# Altium PCB v0.0.PcbDoc
Units mil, origin at the board's own origin, x right, y up, seen from the top; angles counter-clockwise.
Board outline 2000 x 1000 mil, 2 copper layers (Top Layer, Bottom Layer); 73 components, 38 nets, 200 pads, 10 vias.
Unrouted connection lines stored in the file: 154.
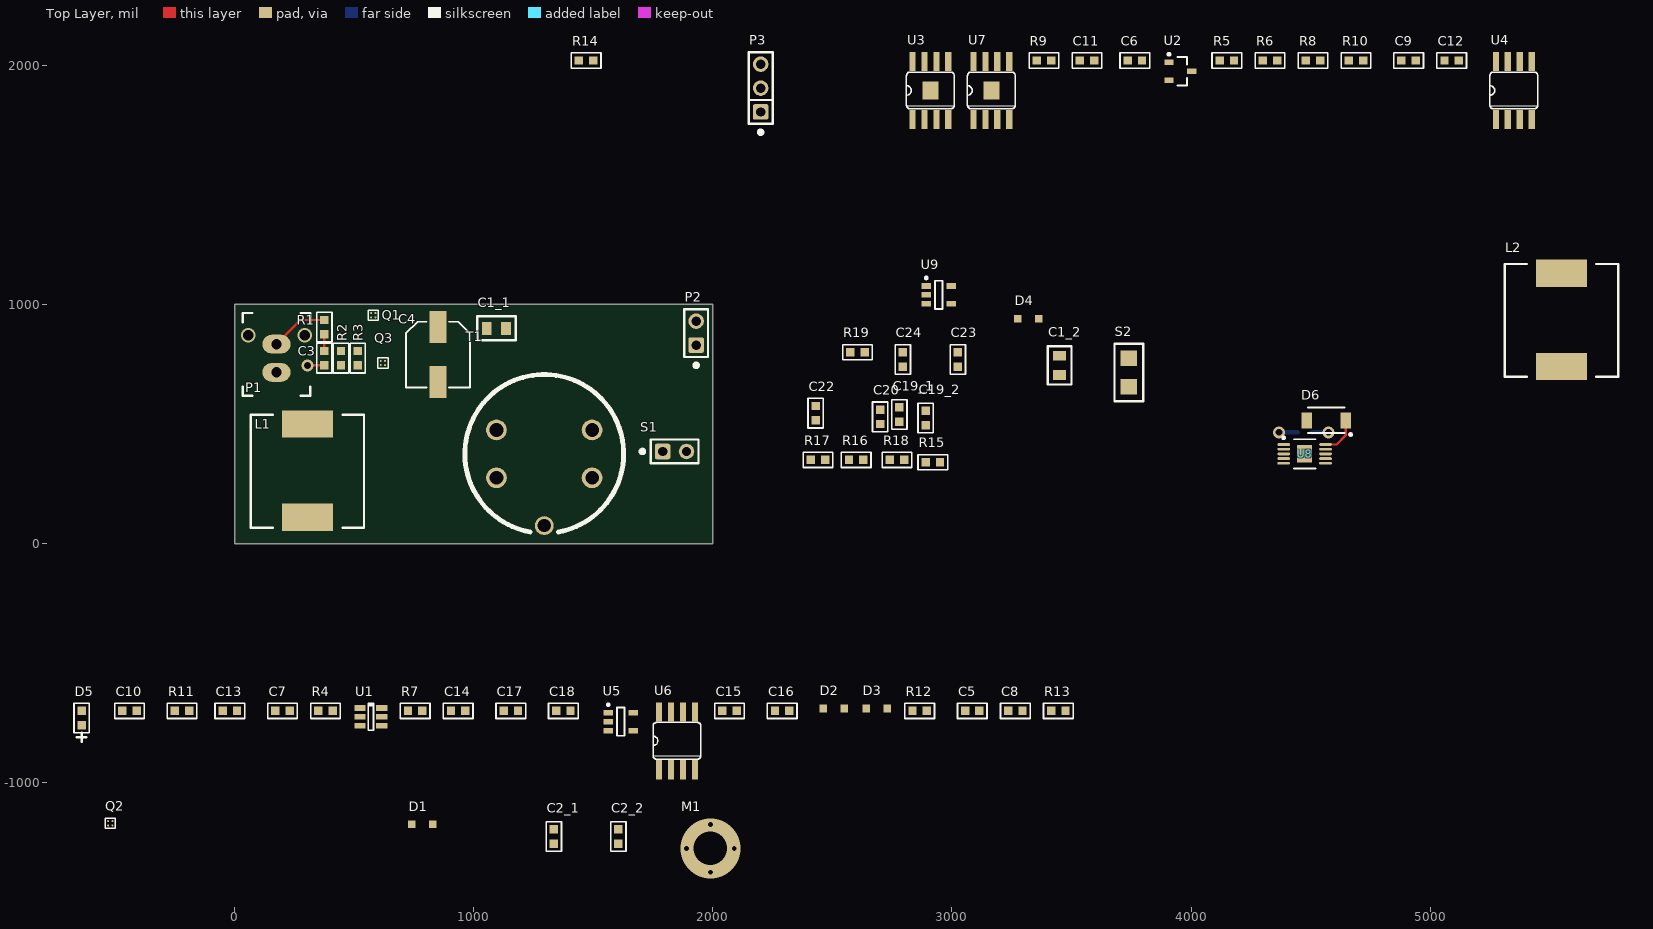
[diagram p0: Top Layer view]
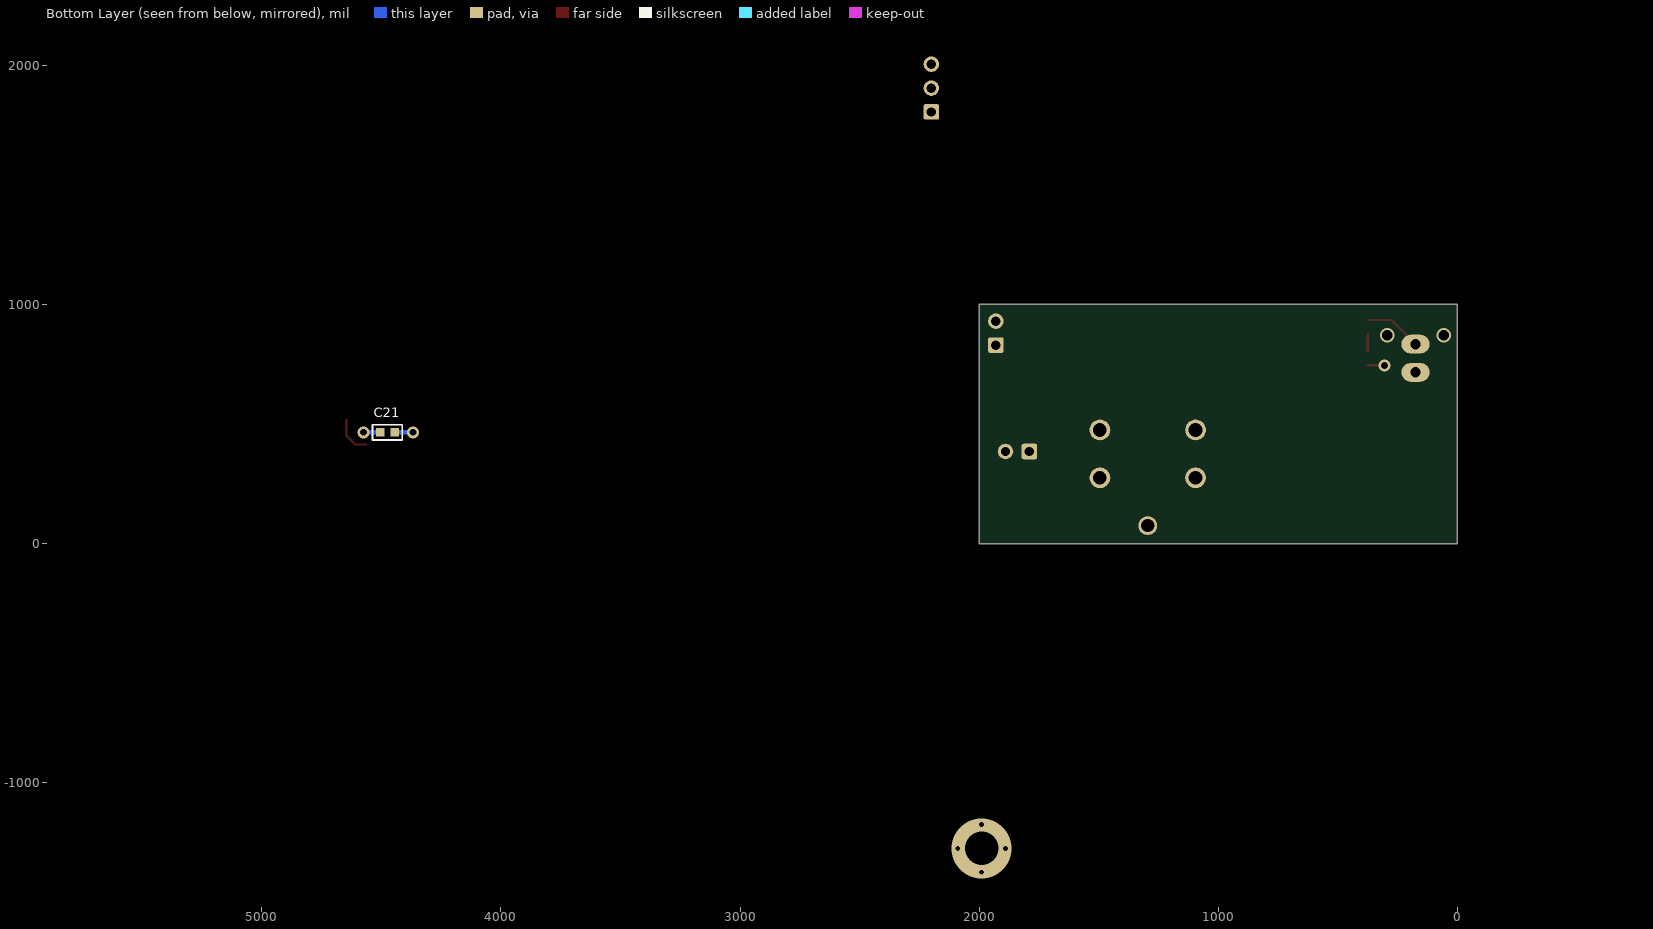
[diagram p1: Bottom Layer view, seen from below]

## Layer stack, top to bottom
Top Solder: solder mask 0.4, Solder Resist, Dk 3.5
Top Layer: signal copper 1.4
Dielectric 1: dielectric 12.6, FR-4, Dk 4.8
Bottom Layer: signal copper 1.4
Bottom Solder: solder mask 0.4, Solder Resist, Dk 3.5

## Board outline
0,0 0,1000 2000,1000 2000,0

## Design rules (kind name [scope] priority, off if disabled: settings)
Clearance [All] p1: gap=10 ignorepadtopadclearanceinfootprint=FALSE except(0: Arc-Hole Track-Hole SMDPad-Hole THPad-Hole Via-Hole Fill-Hole Poly-Hole Region-Hole Text-Hole)
PolygonConnect [All] p1: connectstyle=Relief reliefconductorwidth=10 reliefentries=4 polygonreliefangle="90 Angle" airgapwidth=10
RoutingVias [All] p1: holewidth=28 width=50 viastyle="Through Hole" minholewidth=28 minwidth=50 maxholewidth=28 maxwidth=50
SilkToSilkClearance [All] p1 off: silktosilkclearance=10
SolderMaskExpansion [All] p1: expansion=4
Width [All] p1: maxlimit=50 minlimit=10 preferedwidth=10 bottomlayer_maxwidth=10 minimp=50.000000 maximp=50.000000 favimp=50.000000
29 further rules are at their usual default settings.

## Components (designator, comment, footprint, x,y, rotation, side; value= is the part's Value field where it differs from the comment)
C1_1 "TriCap" TRICAP_0805 1095,900 r0 top value=1u
C1_2 "TriCap" tricap_0805 3450,745 r90 top value=1u
C2_1 "TriCap" TRICAP_0603 1335,-1225 r90 top value=10u
C2_2 "TriCap" TRICAP_0603 1605,-1225 r90 top value=10u
C3 "Cap" SMD0603_CAP 375,775 r90 top value=100n
C4 "Cap" CAP_RADIAL_D 850,790 r270 top value=10u
C5 "Cap" SMD0603_CAP 3085,-700 r0 top value=2.2u
C6 "Cap" SMD0603_CAP 3765,2020 r0 top value=2.2u
C7 "Cap" SMD0603_CAP 200,-700 r0 top value=330p
C8 "Cap" SMD0603_CAP 3265,-700 r0 top value=10n
C9 "Cap" SMD0603_CAP 4910,2020 r0 top value=500p
C10 "Cap" SMD0603_CAP -440,-700 r0 top value=440p
C11 "Cap" SMD0603_CAP 3565,2020 r0 top value=330p
C12 "Cap" SMD0603_CAP 5090,2020 r0 top value=330p
C13 "Cap" SMD0603_CAP -20,-700 r0 top value=1n
C14 "Cap" SMD0603_CAP 935,-700 r0 top value=10n
C15 "Cap" SMD0603_CAP 2070,-700 r0 top value=2.2u
C16 "Cap" SMD0603_CAP 2290,-700 r0 top value=10n
C17 "Cap" SMD0603_CAP 1155,-700 r0 top value=10n
C18 "Cap" SMD0603_CAP 1375,-700 r0 top value=10n
C19_1 "TriCap" TRICAP_0603 2780,540 r90 top value=10u
C19_2 "TriCap" TRICAP_0603 2890,525 r90 top value=10u
C20 "Cap" SMD0603_CAP 2700,530 r90 top value=100n
C21 "Cap" SMD0603_CAP 4475,465 r0 bottom value=100n
C22 "Cap" SMD0603_CAP 2430,545 r90 top value=4.7n
C23 "Cap" SMD0603_cap 3025,770 r90 top value=100n
C24 "Cap" SMD0603_cap 2795,770 r90 top value=100n
D1 "Zener" SOD-323F 785,-1175 r0 top
D2 "Zener" SOD-323F 2505,-690 r0 top
D3 "Zener" SOD-323F 2685,-690 r0 top
D4 "Zener" SOD-323F 3320,940 r0 top
D5 "LED" "SMD0603 POLARIZED" -640,-730 r90 top
D6 "Shottky" SOD-128 4565,515 r180 top
L1 "Inductor" NONSTANDARD_10UH 305,305 r0 top value=10u
L2 "Inductor" NONSTANDARD_68UH 5550,935 r0 top value=68u
M1 "MountHole" MOUNTHOLE_M3 1990,-1275 r0 top
P1 "Microfit 2x1" "MICROFIT 2X1" 175,775 r0 top
P2 "Header" "HEADER 2X1" 1930,830 r90 top
P3 "Header" "HEADER 3X1" 2200,1805 r90 top
Q1 "GaN PowerFET" "GAN BUMPED DIE" 580,955 r0 top
Q2 "GaN PowerFET" "GAN BUMPED DIE" -520,-1170 r0 top
Q3 "GaN PowerFET" "GaN Bumped Die" 620,755 r90 top
R1 "Res" SMD0603 375,905 r270 top value=200k
R2 "Res" SMD0603 445,775 r90 top value=200k
R3 "Res" SMD0603 515,775 r270 top value=23.7k
R4 "Res" SMD0603 380,-700 r0 top value=73.2k
R5 "Res" SMD0603 4150,2020 r0 top value=23.7k
R6 "Res" SMD0603 4330,2020 r0 top value=1M
R7 "Res" SMD0603 755,-700 r0 top value=200k
R8 "Res" SMD0603 4510,2020 r0 top value=2.2k
R9 "Res" SMD0603 3385,2020 r0 top value=21k
R10 "Res" SMD0603 4690,2020 r0 top value=1k
R11 "Res" SMD0603 -220,-700 r0 top value=3.3k
R12 "Res" SMD0603 2865,-700 r0 top value=100
R13 "Res" SMD0603 3445,-700 r0 top value=100
R14 "Res" SMD0603 1470,2020 r0 top value=0
R15 "Res" SMD0603 2920,340 r0 top value=200k
R16 "Res" SMD0603 2599.37,350 r0 top value=36k
R17 "Res" SMD0603 2440,350 r0 top value=200k
R18 "Res" SMD0603 2770,350 r0 top value=22k
R19 "Res" SMD0603 2605,800 r0 top value=200k
S1 "Header" "Header 2x1" 1790,385 r0 top
S2 "Fuse_SMD" smd1206 3740,715 r90 top
T1 "Transformer" P1408 1295,375 r270 top
U1 "OPA835" SOT23-6L 570,-725 r0 top
U2 "MAX6101" SOT23 3955,1975 r0 top
U3 "RT9068" SOIC-8_PAD 2910,1895 r0 top
U4 "555" SOIC8 5350,1895 r0 top
U5 "MCP6541U" SOT23-5LEAD 1615,-745 r0 top
U6 "LM5110-3M" SOIC8 1850,-825 r0 top
U7 "RT9068" SOIC-8_PAD 3165,1895 r0 top
U8 "TPS54260" MSSOP-10 4475,375 r0 top
U9 "NC7SZ04" SOT23-5LEAD 2945,1040 r0 top

## Footprints (in the part's own frame and the unit in brackets; to place one, negate y for a bottom-side part, rotate by r counter-clockwise, add the part's x,y. Pads: shape width x height; smd on the part's side, far side on the other; paste and mask are expansions set on the pad)
CAP_RADIAL_D [mm] "Aluminum Electrolytic Capacitor, Body 7.00x6.60x6.10mm, IPC Low Density"
  rect 3.4x1.8 smd: 1(-2.925,0) 2(2.925,0)
  silkscreen extent -3.5,-3.4 3.5,3.4, body extent -3.88,-3.4 3.88,3.4, height 6.1
"GAN BUMPED DIE" [mm] "4-Lead"
  round 0.21 smd: D(0.225,0.225) G(-0.225,0.225) S(-0.225,-0.225) S(0.225,-0.225)
  silkscreen extent -0.55,-0.55 0.55,0.55, body extent -0.71,-0.55 0.54,0.55, height 1.35
"GaN Bumped Die" [mm] "4-Lead"
  round 0.21 smd: D(0.225,0.225) G(-0.225,0.225) S(-0.225,-0.225) S(0.225,-0.225)
  silkscreen extent -0.55,-0.55 0.55,0.55, body extent -0.71,-0.55 0.54,0.55, height 1.35
"HEADER 2X1" [mil] "PinHeader 1x2 TH Pitch 2.54mm"
  rrect25% 65x65 hole 39.37: 1(0,0)
  round 65 hole 39.37: 2(100,0)
  silkscreen extent -91,-50 150,50, body extent -50,-50 150,50, height 374
"Header 2x1" [mil] "PinHeader 1x2 TH Pitch 2.54mm"
  rrect25% 65x65 hole 39.37: 1(0,0)
  round 65 hole 39.37: 2(100,0)
  silkscreen extent -91,-50 150,50, body extent -50,-50 150,50, height 374
"HEADER 3X1" [mil] "PinHeader 1x3 TH Pitch 2.54mm"
  rrect25% 65x65 hole 39.37: 1(0,0)
  round 65 hole 39.37: 2(100,0) 3(200,0)
  silkscreen extent -91,-50 250,50, body extent -50,-50 250,50, height 374
"MICROFIT 2X1" [mm]
  oval 3x2 hole 1.1: 1(0,1.5) 2(0,-1.5)
  silkscreen extent -3.58,-4 3.58,4.8, body extent -3.57,-3.97 3.58,7, height 17.6
MOUNTHOLE_M3 [mil]
  body extent -104,-100 104,109, height 71
MSSOP-10 [mm] "TSSOP, 10-Leads, Body 3.00x3.00mm, Pitch 0.50mm, Thermal Pad 1.88x1.57mm, IPC Medium Density"
  oval 1.35x0.3 smd: 1(-2.225,1) 2(-2.225,0.5) 3(-2.225,0) 4(-2.225,-0.5) 5(-2.225,-1) 6(2.225,-1) 7(2.225,-0.5) 8(2.225,0) 9(2.225,0.5) 10(2.225,1)
  rect 1.57x1.88 smd: 11(0,0)
  silkscreen extent -2.35,-1.55 1.15,1.82, body extent -2.45,-1.55 2.45,1.55, height 1.1
NONSTANDARD_10UH [mm]
  rect 5.4x2.9 smd: 1(0,4.95) 2(0,-4.95)
  silkscreen extent -6.02,-6.05 5.99,5.95, body extent -6,-6.05 6,5.95, height 5.97
NONSTANDARD_68UH [mm]
  rect 5.4x2.9 smd: 1(0,4.95) 2(0,-4.95)
  silkscreen extent -6.05,-6.05 5.99,5.95, body extent -6,-6.05 6,5.95, height 9.45
P1408 [mm]
  round 2.2 hole 1.45: 1(2.54,5.08) 3(-2.54,5.08) 4(-2.54,-5.08) 6(2.54,-5.08)
  round 2 hole 1.4: 5(7.62,0)
  silkscreen extent -8.43,-8.43 8.3,8.43, body extent -8.2,-8.2 8.2,8.2, height 12
SMD0603 [mil]
  rect 35x35 smd: 1(-30,0) 2(30,0)
  silkscreen extent -62,-32 62,32, body extent -31,-16 32,16, height 18
"SMD0603 POLARIZED" [mil]
  rect 35x35 smd: 1(-30,0) 2(30,0)
  silkscreen extent -100,-32 62,32, body extent -31,-16 32,16, height 18
SMD0603_CAP [mil]
  rect 35x35 smd: 1(-30,0) 2(30,0)
  silkscreen extent -62,-32 62,32, body extent -37,-22 30,14, height 35
SMD0603_cap [mil]
  rect 35x35 smd: 1(-30,0) 2(30,0)
  silkscreen extent -62,-32 62,32, body extent -37,-22 30,14, height 35
smd1206 [mil]
  rect 65x70 smd: 1(-60,0) 2(60,0)
  silkscreen extent -120,-60 120,60, body extent -61,-30 61,31, height 22
SOD-128 [mm] "SODFL, 2-Leads, Body 2.50x4.70mm, IPC Medium Density"
  rect 1.1x1.7 smd: A(2.075,0) K(-2.075,0)
  silkscreen extent -2.73,-1.35 1.95,1.62, body extent -2.6,-1.35 2.6,1.35, height 1.11
SOD-323F [mm]
  rect 0.8x0.8 smd: A(-1.12,0) K(1.12,0)
  body extent -1.38,-0.77 1.48,0.73, height 1.12
SOIC8 [mil]
  rect 26x80 smd mask+3: 1(-75,-121) 2(-25,-121) 3(25,-121) 4(75,-121) 5(75,121) 6(25,121) 7(-25,121) 8(-75,121)
  silkscreen extent -100,-77 100,77, body extent -96,-118 96,118, height 69
SOIC-8_PAD [mil]
  rect 26x80 smd mask+3: 1(-75,-121) 2(-25,-121) 3(25,-121) 4(75,-121) 5(75,121) 6(25,121) 7(-25,121) 8(-75,121)
  rect 66.93x74.8 smd: 9(0,0)
  silkscreen extent -100,-77 100,77, body extent -96,-118 96,118, height 69
SOT23 [mm] "SOT23, 3-Leads, Body 2.90x2.45mm, Pitch 0.95mm, IPC Medium Density"
  rect 1x0.6 smd: 1(-1.2,0.95) 2(-1.2,-0.95) 3(1.2,0)
  silkscreen extent -1.32,-1.5 0.7,1.92, body extent -1.26,-1.49 1.29,1.51, height 1
SOT23-5LEAD [mm] "SOT23, 5-Leads, Body 2.95x2.80mm, Pitch 0.95mm, IPC Medium Density"
  rect 1.05x0.6 smd: 1(-1.325,0.95) 2(-1.325,0) 3(-1.325,-0.95) 4(1.325,-0.95) 5(1.325,0.95)
  silkscreen extent -1.45,-1.5 0.4,1.92, body extent -1.66,-1.5 1.55,1.5, height 0.92
SOT23-6L [mm] "ESDA6V1BC6"
  rect 1.2x0.6 smd: 1(-1.15,0.95) 2(-1.15,0) 3(-1.15,-0.95) 4(1.15,-0.95) 5(1.15,0) 6(1.15,0.95)
  silkscreen extent -0.28,-1.43 0.28,1.43, body extent -1.42,-1.51 1.42,1.41, height 1.1
TRICAP_0603 [mil]
  rect 35x35 smd: 1(-30,0) 2(30,0)
  silkscreen extent -62,-32 62,32, body extent -33,-18 33,18, height 106
TRICAP_0805 [mil]
  rect 40x55 smd: 1(-40,0) 2(40,0)
  silkscreen extent -80,-50 80,50, body extent -41,-27 41,27, height 159
tricap_0805 [mil]
  rect 40x55 smd: 1(-40,0) 2(40,0)
  silkscreen extent -80,-50 80,50, body extent -41,-27 41,27, height 159

## Part data
C3 C5 C6 C7 C8 C9 C10 C11 C12 C13 C14 C15 C16 C17 C18 C20 C21 C22 C23 C24: library part "Capacitor Ceramic", "Ceramic Chip Capacitor"
C4: library part "Capacitor Polarized", "Polarized Capacitor (Surface Mount)"
P2 S1: library part "Header 2x1", "Header, 2-Pin"
P3: library part "Header 3x1", "Header, 2-Pin"
R1 R2 R3 R4 R5 R6 R7 R8 R9 R10 R11 R12 R13 R14 R15 R16 R17 R18 R19: library part Resistor, "Resistor"
L1 L2: Code_IEC=1005, Code_JEITA=0402, LatestRevisionDate=29-May-2009, LatestRevisionNote="IPC-7351 Footprint Added.", PackageDescription="Chip Inductor", PackageReference=0402-A, Published=8-Jun-2000, Publisher="Altium Limited"

## Via types
v1: diameter 40, hole 20, Top Layer to Bottom Layer, 4 vias
v2: diameter 50, hole 28, Top Layer to Bottom Layer, 3 vias
v3: diameter 59.06, hole 43.31, Top Layer to Bottom Layer, 2 vias
v4: diameter 250, hole 140, Top Layer to Bottom Layer, 1 vias

## Nets (pads, with @x,y where several pads share a name; then routed paths per layer and width w, separated by ;. In a path a pad name is that pad's centre, name@x,y a point inside that pad or via, vN(x,y) a via of type N, cw(c..) or ccw(c..) an arc to the next point about the centre after c; other vN are vias at no path point)
1v25: C6.1 U1.3 U2.2
5v0: C5.1 C8.1 C14.1 C17.1 C18.1 U1.5 U1.6 U2.1 U3.1 U3.2 U4.4 U4.8 U5.5
GND: C2_1.1 C2_2.1 C3.1 C5.2 C6.2 C7.2 C8.2 C11.1 C12.1 C13.2 C14.2 C15.2 C16.2 C17.2 C18.2 C19_1.1 C19_2.1 C20.2 C22.2 C23.1 C24.1 D1.A D2.A D3.A D4.A D6.A P1.2 P2.2 P3.3 Q2.S Q3.S R3.2 R5.2 R8.2 R14.2 R16.1 R17.1 T1.5 U1.2 U2.3 U3.6 U3.7 U3.9 U4.1 U5.2 U6.1 U6.3 U7.5 U7.6 U7.7 U7.9 U8.9 U8.11 U9.3 | length 70
  Top Layer w10: v2(305,745) C3.1
NetC1_1_1: C1_1.1 C1_2.1 L1.2 Q1.S
NetC3_2: C3.2 R1.1 R2.2 | length 70
  Top Layer w10: C3.2 375,875
NetC4_2: C4.2 L1.1 Q3.D
NetC9_1: C9.1 R4.2 R5.1 R6.2
NetC9_2: C9.2 C10.2 R6.1 U1.4
NetC10_1: C10.1 R7.2
NetC11_2: C11.2 R9.1 U4.2 U4.6
NetC12_2: C12.2 R10.2 R11.1
NetC20_1: C20.1 U8.4
NetC21_1: C21.1 U8.1 | length 77.3
  Bottom Layer w20: v2(4367.72,465) C21.1
NetC21_2: C21.2 D6.K L2.1 U8.10 | length 232.9
  Top Layer w10: U8.10 4609.37,414.37 4646.69,451.69 D6.K
  Bottom Layer w20: C21.2 v2(4575,465)
NetC22_1: C22.1 R18.1
NetD4_K: D4.K Q3.G R2.1 R3.1
NetD5_2: D5.2 R8.1
NetP1_1: P1.1 S2.1
NetP3_2: P3.2 R14.1 S1.1
NetQ1_D: Q1.D T1.3
NetQ1_G: Q1.G R12.2
NetQ2_D: Q2.D T1.4
NetQ2_G: Q2.G R13.2
NetR15_1: R15.1 R16.2 U8.7
NetR17_2: R17.2 U8.5
NetR18_2: R18.2 U8.8
PD: R19.2 S1.2 U3.5 U9.2
PDbar: U8.3 U9.4
V555: R9.2 R10.1 U4.3
VBAT: C1_1.2 C1_2.2 C4.1 C23.2 C24.2 R1.2 S2.2 T1.1 U3.8 U7.8 U8.2 | length 241.8
  Top Layer w10: 175,834.06 275.94,935 375,935
Vbuck: C19_1.2 C19_2.2 L2.2 R15.2 U6.6 U6.8
Vcmp: U5.4 U6.2 U6.4
Vconst5: C15.1 C16.1 P3.1 R19.1 U7.1 U7.2 U9.5
Vopa: C7.1 R7.1 U1.1 U5.1
VOUT: C2_1.2 C2_2.2 D1.K D5.1 P2.1 R4.1 T1.6
Vq1: D2.K R12.1 U6.5
Vq2: D3.K R13.1 U6.7
Vtri: C13.1 R11.2 U5.3
pads on no net: U3.3 U3.4 U4.5 U4.7 U7.3 U7.4 U8.6 U9.1
copper on no net:
  other v1: 1990,-1375 1890,-1275 2090,-1275 1990,-1175
  other v3: 56.89,871.06 293.11,871.06
  other v4: 1990,-1275